# Altium PCB WSN_PCB_NODE.PcbDoc
Units mil, origin at the board's own origin, x right, y up, seen from the top; angles counter-clockwise.
Board outline 2580 x 2850 mil, 2 copper layers (Top Layer, Bottom Layer); 79 components, 80 nets, 350 pads, 109 vias.
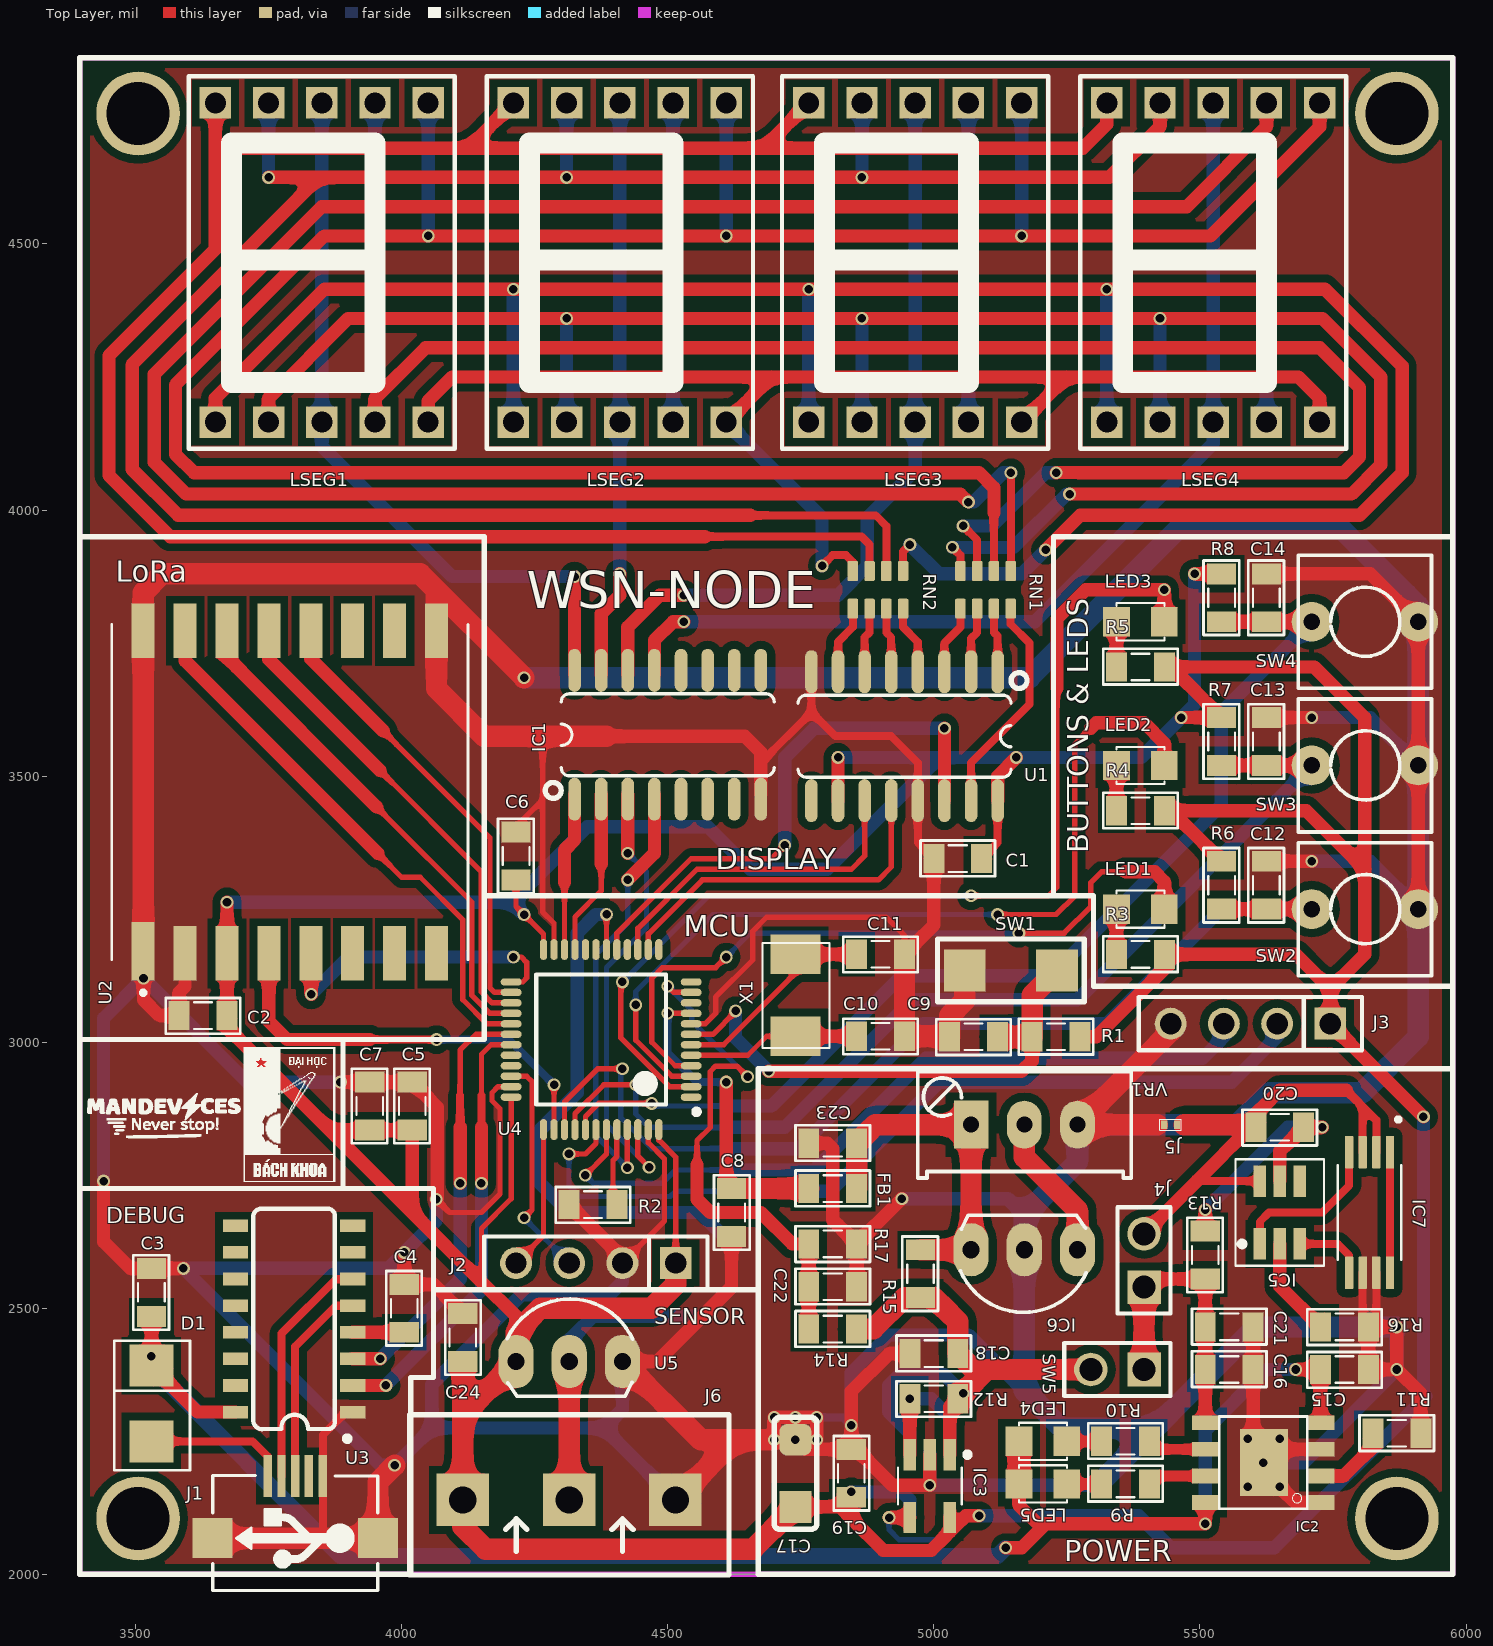
[diagram p0: Top Layer view]
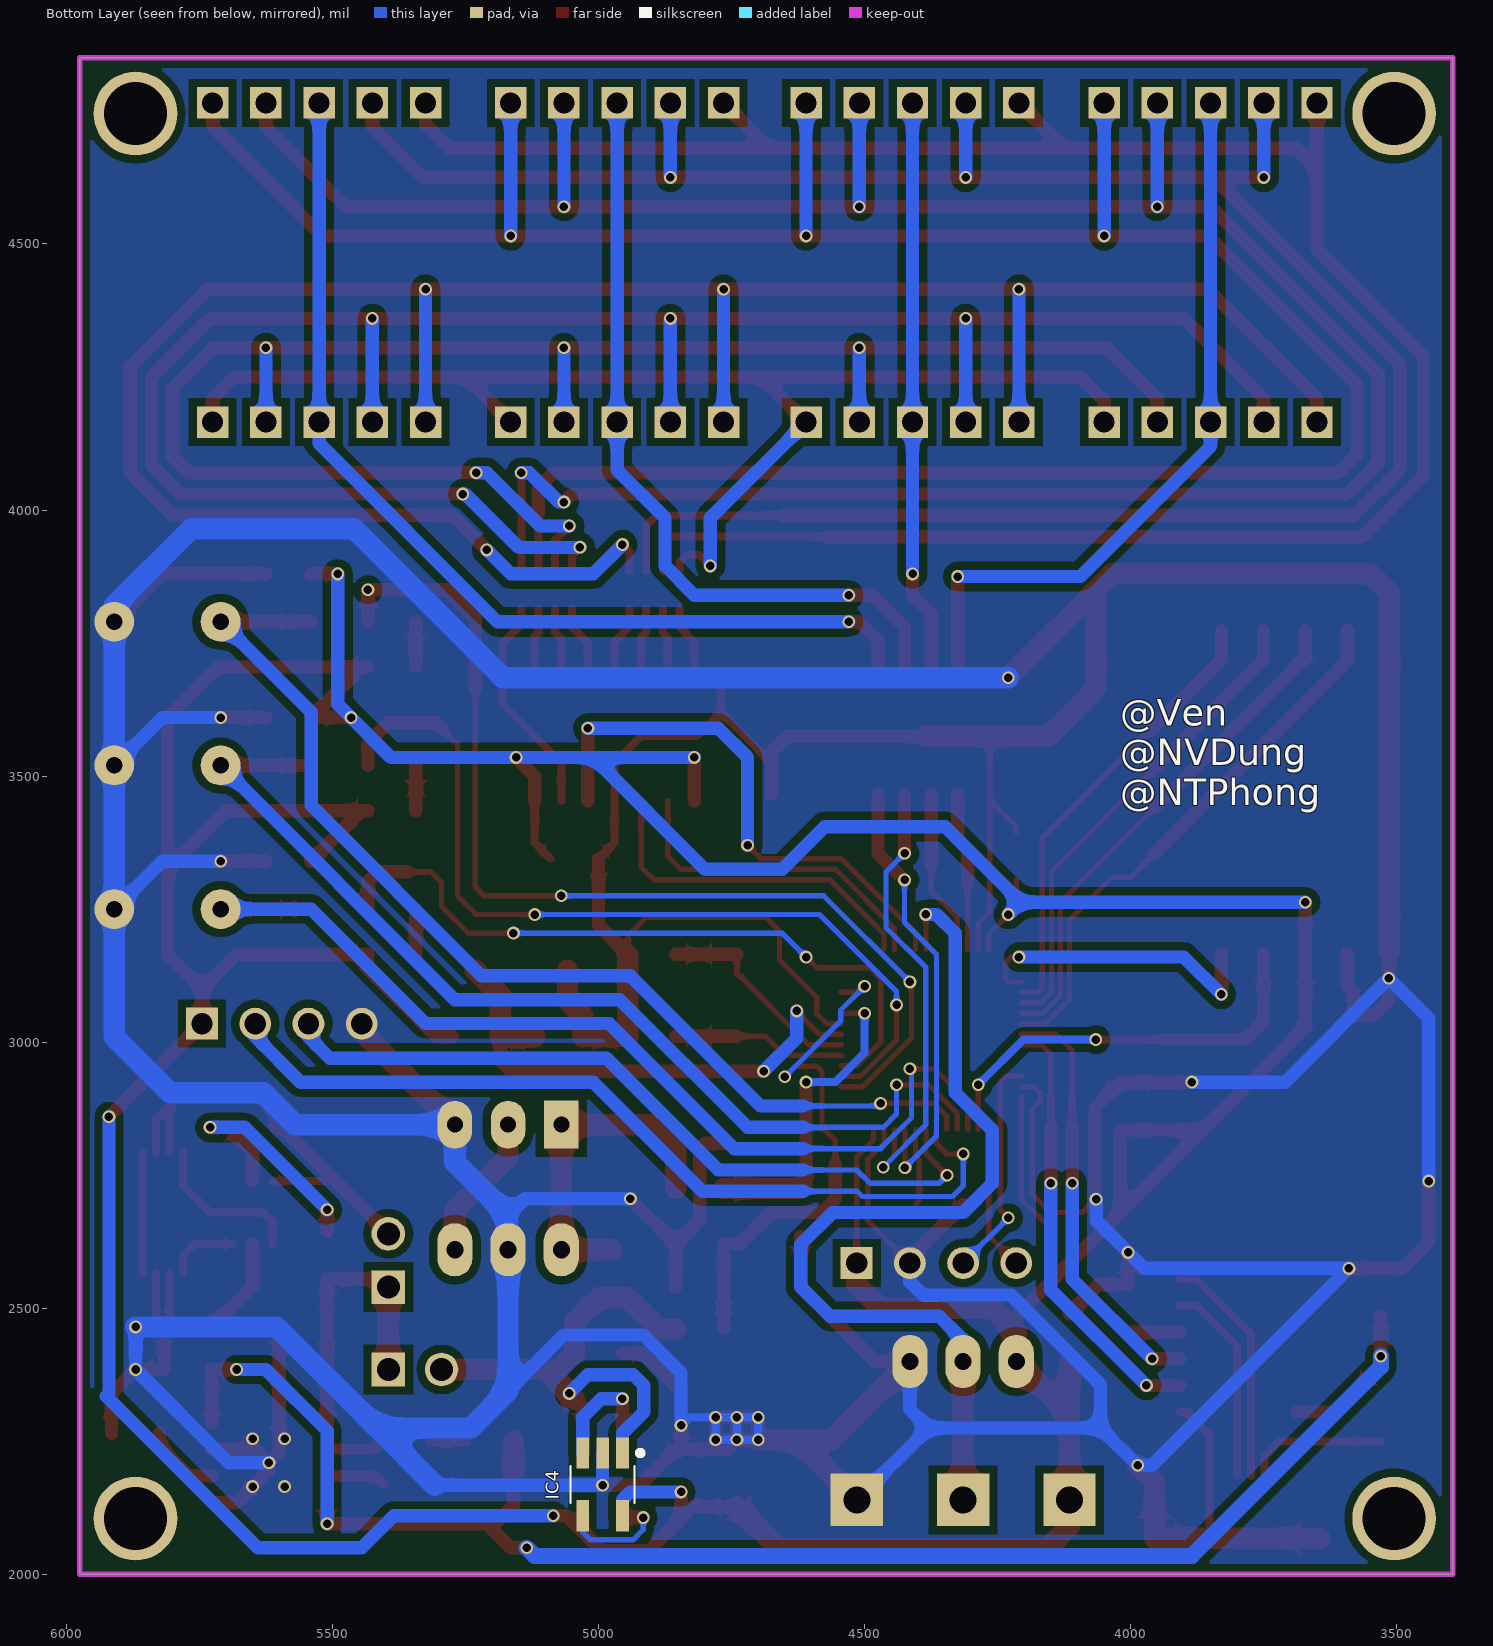
[diagram p1: Bottom Layer view, seen from below]
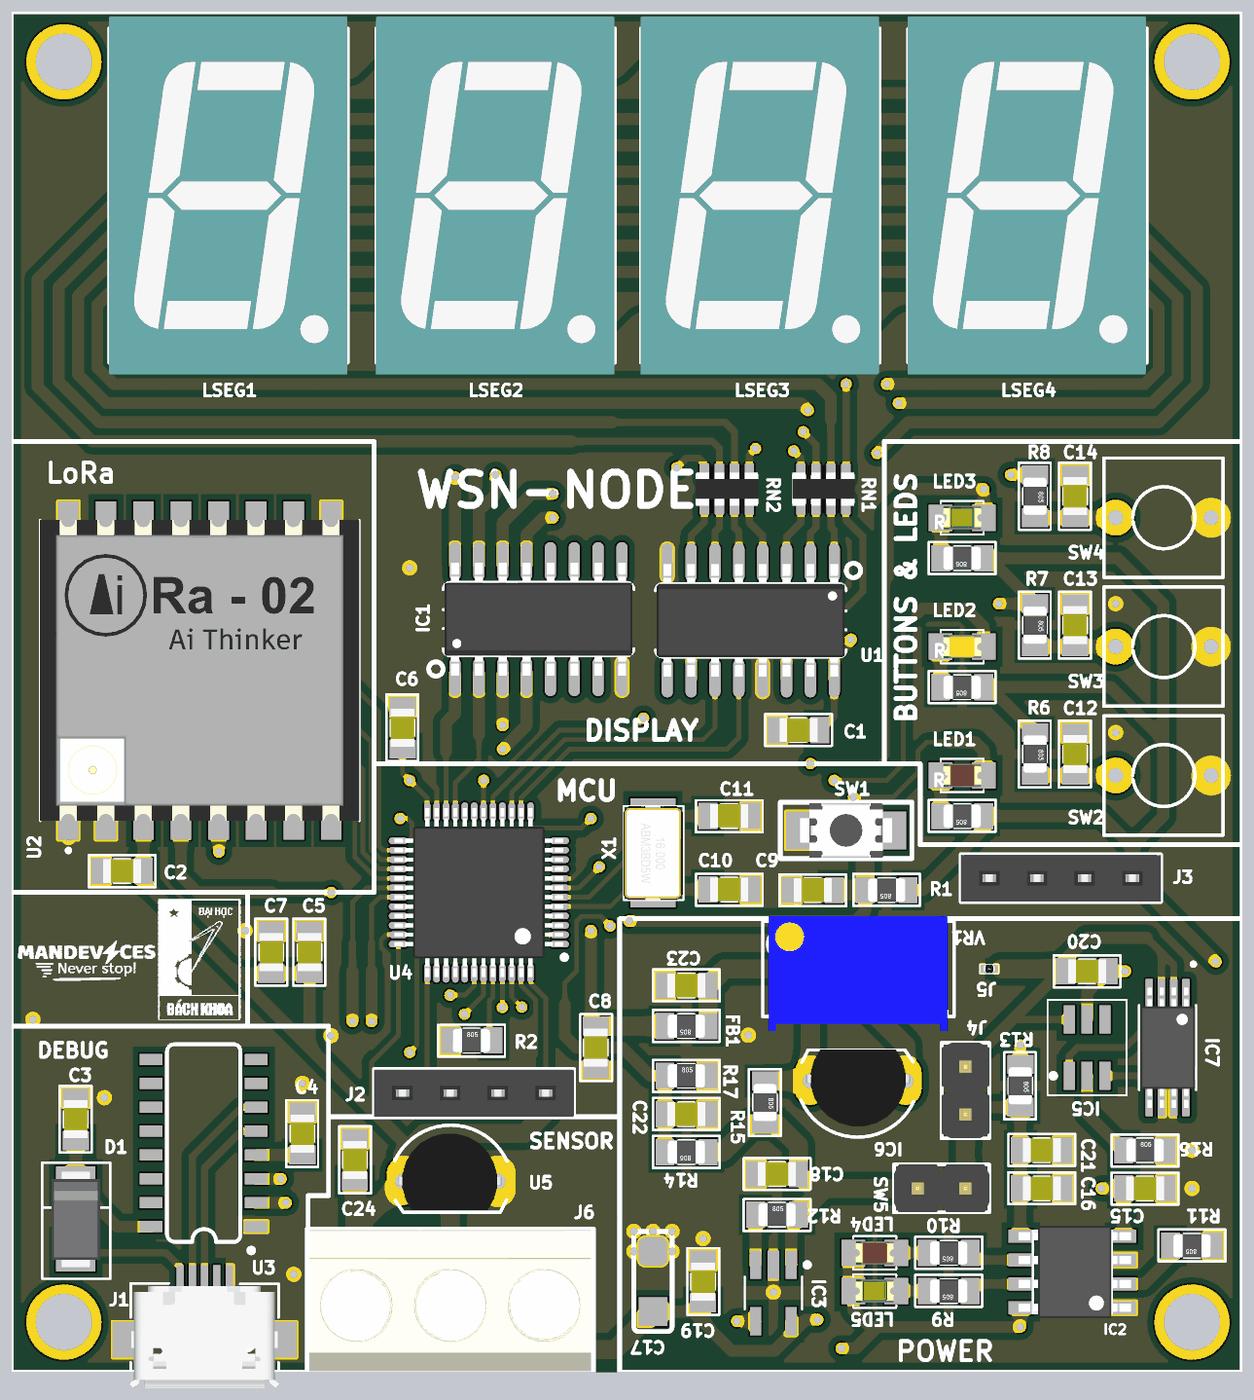
[diagram p2: 3D render of the assembled board from above, using the file's embedded part models]

## Layer stack, top to bottom
Top Solder: solder mask 0.4, Solder Resist, Dk 3.5
Top Layer: signal copper 1.4
Dielectric 1: dielectric 12.6, FR-4, Dk 4.8
Bottom Layer: signal copper 1.4
Bottom Solder: solder mask 0.4, Solder Resist, Dk 3.5

## Board outline
3395,2000 3395,4850 5975,4850 5975,2000

## Design rules (kind name [scope] priority, off if disabled: settings)
Clearance [All] p1: gap=15 ignorepadtopadclearanceinfootprint=TRUE except(0: Arc-Text Arc-Hole Track-Text Track-Hole SMDPad-Text SMDPad-Hole THPad-Text THPad-Hole Via-Text Via-Hole Fill-Text Fill-Hole Poly-Text Poly-Hole Region-Text Region-Hole Text-Text Text-Hole; 7: Arc-Arc Arc-Track Arc-SMDPad Track-Track Track-SMDPad SMDPad-SMDPad; 10: Arc-THPad Arc-Via Track-THPad Track-Via SMDPad-THPad SMDPad-Via THPad-THPad THPad-Via Via-Via)
DiffPairsRouting [All] p1: maxlimit=10 minlimit=10 mostfreqgap=10 toplayer_minwidth=15 toplayer_maxwidth=15 toplayer_prefwidth=15 bottomlayer_minwidth=15 bottomlayer_maxwidth=15 bottomlayer_prefwidth=15 maxuncoupledlength=500
PolygonConnect [All] p1: connectstyle=Direct reliefconductorwidth=10 reliefentries=4 polygonreliefangle="90 Angle" airgapwidth=10
RoutingVias [All] p1: holewidth=16 width=24 viastyle="Through Hole" minholewidth=16 minwidth=24 maxholewidth=20 maxwidth=28
SolderMaskExpansion [All] p1: expansion=4
Width [All] p1: maxlimit=40 minlimit=10 preferedwidth=25
29 further rules are at their usual default settings.

## Classes and differential pairs
component class U_SENSOR: C24 J6 U5
component class U_POWER: C15 C16 C17 C18 C19 C20 C21 C22 C23 FB1 IC2 IC3 IC4 IC5 IC6 IC7 J4 J5 LED4 LED5 R9 R10 R11 R12 R13 R14 R15 R16 R17 SW5 VR1
component class U_MCU: C5 C6 C7 C8 C9 C10 C11 C12 C13 C14 J2 J3 LED1 LED2 LED3 R1 R2 R3 R4 R5 R6 R7 R8 SW1 SW2 SW3 SW4 U4 X1
component class U_DISPLAY: C1 IC1 LSEG1 LSEG2 LSEG3 LSEG4 RN1 RN2 U1
component class U_COMM: C2 C3 C4 D1 J1 U2 U3
differential pair D: +D_P -D_N

## Components (designator, comment, footprint, x,y, rotation, side; value= is the part's Value field where it differs from the comment)
C1 "100nF" CAP_0805 5045,3345 r180 top value=33p
C2 "10uF" CAP_0805 3626.89,3050 r0 top value=33p
C3 "10uF" CAP_0805 3530,2530 r270 top value=33p
C4 "100nF" CAP_0805 4005,2500 r270 top value=33p
C5 "100nF" CAP_0805 4020,2880 r270 top value=33p
C6 "100nF" CAP_0805 4215,3350 r270 top value=33p
C7 "100nF" CAP_0805 3940,2880 r270 top value=33p
C8 "100nF" CAP_0805 4620,2680 r90 top value=33p
C9 "10uF" CAP_0805 5074.8,3010 r0 top value=33p
C10 "33pF" CAP_0805 4900,3011.13 r0 top value=33p
C11 "33pF" CAP_0805 4900,3165.13 r0 top value=33p
C12 "10uF" CAP_0805 5625,3295 r270 top value=33p
C13 "10uF" CAP_0805 5625,3565 r270 top value=33p
C14 "10uF" CAP_0805 5625,3835 r270 top value=33p
C15 "100nF" CAP_0805 5771.54,2385 r0 top value=33p
C16 "100nF" CAP_0805 5555,2385 r180 top value=33p
C17 "220uF" CAP_TANTALUM_3216 4740,2190 r90 top
C18 "470nF" CAP_0805 5000,2415 r180 top value=33p
C19 "100nF" CAP_0805 4845,2190 r90 top value=33p
C20 "100nF" CAP_0805 5650,2840 r0 top value=33p
C21 "100nF" CAP_0805 5555,2465 r180 top value=33p
C22 "100nF" CAP_0805 4810,2540.44 r180 top value=33p
C23 "100nF" CAP_0805 4810,2810 r180 top value=33p
C24 "100nF" CAP_0805 4115,2445 r90 top value=33p
D1 "Diode SMD" DIO-214AC(SMA) 3533,2299 r270 top value=1N5007
FB1 "Ferrit Bead" RES-SMD-0805 4810,2725 r180 top
IC1 "ULN2003A" SOIC16 4500,3577.64 r90 top
IC2 "TP4056" TP4056 5619.27,2210 r180 top
IC3 "RT9013" SOT23-5 4992.4,2165.94 r270 top
IC4 "RT9013" SOT23-5 4992.4,2169.06 r270 bottom
IC5 "DW01A" SOT23-6 5650,2680 r90 top
IC6 "TL431" qto-92 5170,2610 r180 top
IC7 "FS8205A" FS8205A 5816.54,2680 r270 top
J1 "USB-5" USB-M1 3800,2185 r180 top
J2 "JP4" JP4-C1T 4515,2585 r180 top
J3 "JP4" JP4-C1T 5745,3035 r180 top
J4 "JP2" JP2-D1T 5395,2540 r90 top
J5 "Jumper2" RES-SMD-0201 5445,2845 r180 top
J6 "KF3" KF3-5.08 4115,2140 r0 top
LED1 "LED" LED-0805-Red 5343.19,3250 r0 top value="LED 3 ly Single Colour"
LED2 "LED" LED-0805-Yellow 5343.19,3520 r0 top value="LED 3 ly Single Colour"
LED3 "LED" LED-0805-Green 5343.19,3790 r0 top value="LED 3 ly Single Colour"
LED4 "LED" LED-0805-Red 5160,2250 r0 top value="LED 3 ly Single Colour"
LED5 "LED" LED-0805-Green 5160,2170 r0 top value="LED 3 ly Single Colour"
LSEG1 "7SEG-K" LED7SEG 3849,4465 r0 top
LSEG2 "7SEG-K" LED7SEG 4409,4465 r0 top
LSEG3 "7SEG-K" LED7SEG 4964,4465 r0 top
LSEG4 "7SEG-K" LED7SEG 5524,4465 r0 top
R1 "10k" RES-SMD-0805 5229.8,3010 r180 top
R2 "100k" RES-SMD-0805 4359.53,2695 r0 top
R3 "1k" RES-SMD-0805 5388.19,3165 r180 top
R4 "1k" RES-SMD-0805 5388.19,3435 r180 top
R5 "1k" RES-SMD-0805 5388.19,3705 r180 top
R6 "10k" RES-SMD-0805 5540.73,3295 r270 top
R7 "10k" RES-SMD-0805 5540.73,3565 r270 top
R8 "10k" RES-SMD-0805 5540.73,3835 r270 top
R9 "1k" RES-SMD-0805 5360,2170 r180 top
R10 "1k" RES-SMD-0805 5360,2250 r180 top
R11 "1k2" RES-SMD-0805 5870,2265 r180 top
R12 "10k" RES-SMD-0805 5000,2330 r0 top
R13 "10R" RES-SMD-0805 5510,2600 r270 top
R14 "30k" RES-SMD-0805 4810,2460.94 r180 top
R15 "10k" RES-SMD-0805 4975,2565 r270 top
R16 "1k" RES-SMD-0805 5771.54,2465 r0 top
R17 "100k" RES-SMD-0805 4810,2620.94 r0 top
RN1 "RP330" RN4-0805 5097.24,3850 r270 top
RN2 "RP330" RN4-0805 4895,3850 r270 top
SW1 "SW" "SW 3x2x4" 5144.8,3135 r0 top value="SW chip 2 pin"
SW2 "SW" SW2 5910,3250 r180 top value="SW chip 2 pin"
SW3 "SW" SW2 5910,3520 r180 top value="SW chip 2 pin"
SW4 "SW" SW2 5910,3790 r180 top value="SW chip 2 pin"
SW5 "SW" JP2-D1T 5395,2385 r180 top value="SW chip 2 pin"
U1 "74HC595" SOIC16 4945,3575 r270 top
U2 "Ra-02 LoRa" Ra-02 3790,3470 r90 top
U3 "CH340C" SOP-16 3797.87,2480 r90 top
U4 "STM32" "LQFP 48" 4375,3005 r180 top
U5 "DS18B20" QTO-92A 4315,2400 r0 top
VR1 "10K" VR1 5070,2845 r0 top value="VR 10K"
X1 "8Mhz" "XTAL 5032 SMD" 4740,3087.13 r270 top value=4Mhz

## Footprints (in the part's own frame and the unit in brackets; to place one, negate y for a bottom-side part, rotate by r counter-clockwise, add the part's x,y. Pads: shape width x height; smd on the part's side, far side on the other; paste and mask are expansions set on the pad)
CAP_0805 [mil]
  rect 39.37x55 smd: 1(-45,0) 2(45,0)
  silkscreen extent -70,-34 70,33, body extent -40,-25 40,25, height 24
CAP_TANTALUM_3216 [mil]
  rect 60x60 smd: 1(-62.99,0)
  rrect50% 60x60 smd: 2(62.99,0)
  silkscreen extent -105,-40 105,40, body extent -67,-35 67,35, height 67
DIO-214AC(SMA) [mm] "DO-214AC Diode Smallest Size"
  rect 2x2.1 smd: 1(1.245,-0.076) 2(-2.367,-0.076)
  silkscreen extent -3.56,-1.86 2.62,1.76, body extent -3.13,-1.38 2.07,1.22, height 2.4
FS8205A [mm]
  rrect25% 1.56x0.4 smd: 1(-2.88,1.031) 2(-2.88,0.381) 3(-2.88,-0.269) 4(-2.88,-0.919) 5(2.88,-0.919) 6(2.88,-0.269) 7(2.88,0.381) 8(2.88,1.031)
  silkscreen extent -4.54,-1.46 2.25,1.57, body extent -3.2,-1.4 3.2,1.53, height 1.2
JP2-D1T [mm] "2 pins, 1 row, straight, gold plating"
  rect 1.6x1.6 hole 1.1: 1(0,0)
  round 1.6 hole 1.1: 2(2.54,0)
  silkscreen extent -1.27,-1.27 3.81,1.27, body extent -1.27,-1.27 3.81,1.27, height 8.54
JP4-C1T [mm] "4 row, straight, gold plating"
  rect 1.52x1.52 hole 1.02: 1(0,0)
  round 1.52 hole 1.02: 2(2.54,0) 3(5.08,0) 4(7.62,0)
  silkscreen extent -1.52,-1.27 9.14,1.27, body extent -1.52,-1.25 9.14,1.25, height 8.51
KF3-5.08 [mm]
  rect 2.5x2.5 hole 1.3: 1(0,0) 2(5.08,0) 3(10.147,0)
  silkscreen extent -2.54,-3.58 12.7,4.06, body extent -2.42,-3.51 12.58,3.99, height 10
LED7SEG [mm] "LED7SEG"
  round 1.524 on Top Overlay: 0(4.724,-5.334)
  rect 1.5x1.5 hole 1: 1(-5.055,-7.62) 2(-2.515,-7.62) 3(0.025,-7.62) 4(2.565,-7.62) 5(5.105,-7.62) 6(5.105,7.62) 7(2.565,7.62) 8(0.025,7.62) 9(-2.515,7.62) 10(-5.055,7.62)
  silkscreen extent -6.32,-8.89 6.38,8.89, body extent -6.35,-9.52 6.35,9.53, height 8.03
LED-0805-Green [mil]
  rect 50x55 smd: 1(0,0) 2(90,0)
  silkscreen extent 0,-35 90,35, body extent 5,-25 85,25, height 43
LED-0805-Red [mil]
  rect 50x55 smd: 1(0,0) 2(90,0)
  silkscreen extent 0,-35 90,35, body extent 5,-25 85,25, height 43
LED-0805-Yellow [mil]
  rect 50x55 smd: 1(0,0) 2(90,0)
  silkscreen extent 0,-35 90,35, body extent 5,-25 85,25, height 43
"LQFP 48" [mm] "LQFP, 48-Leads, Body 7,00x7,00mm, Pitch 0,50mm, IPC Medium Density"
  oval 1x0.35 smd: 1(-4.296,2.75) 2(-4.296,2.25) 3(-4.296,1.75) 4(-4.296,1.25) 5(-4.296,0.75) 6(-4.296,0.25) 7(-4.296,-0.25) 8(-4.296,-0.75) 9(-4.296,-1.25) 10(-4.296,-1.75) 11(-4.296,-2.25) 12(-4.296,-2.75) 25(4.296,-2.75) 26(4.296,-2.25) 27(4.296,-1.75) 28(4.296,-1.25) 29(4.296,-0.75) 30(4.296,-0.25) 31(4.296,0.25) 32(4.296,0.75) 33(4.296,1.25) 34(4.296,1.75) 35(4.296,2.25) 36(4.296,2.75)
  oval 0.35x1 smd: 13(-2.75,-4.296) 14(-2.25,-4.296) 15(-1.75,-4.296) 16(-1.25,-4.296) 17(-0.75,-4.296) 18(-0.25,-4.296) 19(0.25,-4.296) 20(0.75,-4.296) 21(1.25,-4.296) 22(1.75,-4.296) 23(2.25,-4.296) 24(2.75,-4.296) 37(2.75,4.296) 38(2.25,4.296) 39(1.75,4.296) 40(1.25,4.296) 41(0.75,4.296) 42(0.25,4.296) 43(-0.25,4.296) 44(-0.75,4.296) 45(-1.25,4.296) 46(-1.75,4.296) 47(-2.25,4.296) 48(-2.75,4.296)
  silkscreen extent -4.68,-3.1 3.1,3.57, body extent -4.5,-4.5 4.5,4.5, height 1.6
qto-92 [mil] "TO-92"
  oval 66x100 hole 32: 1(-100,0) 2(0,0) 3(100,0)
  silkscreen extent -117,-65 120,118, body extent -109,-66 109,95, height 245
QTO-92A [mil] "TO-92"
  oval 66x100 hole 32: 1(100,0) 2(0,0) 3(-100,0)
  silkscreen extent -117,-65 119,118, body extent -110,-61 108,100, height 245
Ra-02 [mm]
  rect 2.8x1.1 smd: 1(-7.6,7)
  rect 2.6x1.1 smd: 2(-7.7,5) 3(-7.7,3) 4(-7.7,1) 5(-7.7,-1) 6(-7.7,-3) 7(-7.7,-5) 8(-7.7,-7) 9(7.7,-7) 10(7.7,-5) 11(7.7,-3) 12(7.7,-1) 13(7.7,1) 14(7.7,3) 15(7.7,5) 16(7.7,7)
  silkscreen extent -9.68,-8.5 8,8.5, body extent -8,-8.49 8,8.51, height 3.03
RES-SMD-0201 [mm]
  rect 0.3x0.4 smd: 1(-0.3,0) 2(0.3,0)
  silkscreen extent -0.51,-0.25 0.51,0.25, body extent -0.3,-0.15 0.3,0.15, height 0.22
RES-SMD-0805 [mil]
  rect 39.37x55 smd: 1(-45,0) 2(45,0)
  silkscreen extent -70,-34 70,33, body extent -39,-25 39,25, height 31
RN4-0805 [mm]
  round 0.254 on Mech15: 0(0,0)
  rrect25% 0.95x0.5 smd: 1(-0.9,1.2) 2(-0.9,0.4) 3(-0.9,-0.4) 4(-0.9,-1.2) 5(0.9,-1.2) 6(0.9,-0.4) 7(0.9,0.4) 8(0.9,1.2)
  Top Layer pour cut-out: -0.4,1.7 0.4,1.7 0.4,-1.7 -0.4,-1.7
  body extent -0.87,-1.68 0.88,1.67, height 0.7
SOIC16 [mm]
  oval 2.05x0.6 smd: 1(-3.075,4.445) 2(-3.075,3.175) 3(-3.075,1.905) 4(-3.075,0.635) 5(-3.075,-0.635) 6(-3.075,-1.905) 7(-3.075,-3.175) 8(-3.075,-4.445) 9(3.075,-4.445) 10(3.075,-3.175) 11(3.075,-1.905) 12(3.075,-0.635) 13(3.075,0.635) 14(3.075,1.905) 15(3.075,3.175) 16(3.075,4.445)
  silkscreen extent -3.04,-5.08 1.96,5.84, body extent -3,-5 3,5, height 1.75
SOP-16 [mm]
  rect 0.6x1.2 smd: 1(-4.445,-2.8) 2(-3.175,-2.8) 3(-1.905,-2.8) 4(-0.635,-2.8) 5(0.635,-2.8) 6(1.905,-2.8) 7(3.175,-2.8) 8(4.445,-2.8) 9(4.445,2.8) 10(3.175,2.8) 11(1.905,2.8) 12(0.635,2.8) 13(-0.635,2.8) 14(-1.905,2.8) 15(-3.175,2.8) 16(-4.445,2.8)
  silkscreen extent -5.84,-2.67 5.26,1.95, body extent -4.95,-3.47 4.95,3.47, height 1.75
SOT23-5 [mm] "SOT23, 5-Leads, Body 3.0x3.0mm (max), Pitch 0.95mm, IPC Medium Density"
  rect 1.5x0.6 smd: 1(-1.5,0.95) 2(-1.5,0) 3(-1.5,-0.95) 4(1.5,-0.95) 5(1.5,0.95)
  silkscreen extent -1.62,-1.52 0.87,1.93, body extent -1.75,-1.52 1.75,1.53, height 1.45
SOT23-6 [mm] "SOT23, 5-Leads, Body 3.0x3.0mm (max), Pitch 0.95mm, IPC Medium Density"
  rect 1.5x0.6 smd: 1(-1.5,0.95) 2(-1.5,0) 3(-1.5,-0.95) 4(1.5,-0.95) 5(1.5,0) 6(1.5,0.95)
  silkscreen extent -2.54,-2.11 2.54,2.11, body extent -1.75,-1.52 1.75,1.53, height 1.45
SW2 [mil] "SW button 2pin, 250x 250 mil"
  round 75 hole 31: 1(0,0) 2(200,0)
  silkscreen extent -25,-125 225,125
"SW 3x2x4" [mm]
  rect 2x2 smd: 1(-2.2,0) 2(2.2,0)
  silkscreen extent -3.5,-1.5 3.5,1.5, body extent -2.45,-1.45 2.45,1.45, height 2
TP4056 [mm]
  rect 1.3x0.7 smd: 1(-2.75,1.905) 2(-2.75,0.635) 3(-2.75,-0.635) 4(-2.75,-1.905) 5(2.75,-1.905) 6(2.75,-0.635) 7(2.75,0.635) 8(2.75,1.905)
  rect 2.3x3.2 smd: 3(-0.025,0)
  silkscreen extent -2.1,-2.2 2.1,2.2, body extent -3.13,-2.45 2.87,2.45, height 1.75
USB-M1 [mm]
  rect 0.4x2 smd: 1(1.3,0) 2(0.65,0) 3(0,0) 4(-0.65,0) 5(-1.321,0)
  rect 1.9x1.9 smd: 5(-3.95,2.968) 5(3.95,2.968)
  silkscreen extent -3.94,-0.03 3.94,5.46, body extent -3.98,0.11 4,5.54, height 2.71
VR1 [mil] "Variable Resistor"
  rect 65x90 hole 30: 1(0,0)
  oval 65x90 hole 30: 2(100,0) 3(200,0)
  silkscreen extent -100,-100 301,100, body extent -88,-130 288,110, height 455
"XTAL 5032 SMD" [mm] "SMD 5032 XTAL Footprint"
  rect 1.9x2.4 smd: 1(-1.981,0) 2(1.93,0)
  silkscreen extent -2.51,-1.57 2.49,1.63, body extent -2.5,-1.6 2.5,1.6, height 1.31

## Part data
C1 C2 C3 C4 C5 C6 C7 C8 C9 C10 C11 C12 C13 C14 C15 C16 C18 C19 C20 C21 C22 C23 C24: library part CapSMD, "Capacitor", LatestRevisionDate=17-Jul-2002, LatestRevisionNote="Re-released for DXP Platform.", PackageReference=RAD-0.3, Published=8-Jun-2000, Publisher="Altium Limited"
C17: library part "Cap Pol", "Polarized Capacitor (Axial)", LatestRevisionDate=17-Jul-2002, LatestRevisionNote="Re-released for DXP Platform.", PackageReference=POLAR0.8, Published=8-Jun-2000, Publisher="Altium Limited"
D1: "Default Diode", Code - JEDEC=DO-214-AB, Published=8-Jun-2000, Publisher="Altium Limited", Revision="July-2002: Re-released for DXP Platform."
FB1: "Generic Ferrit Bead"
IC1: "High-Voltage, High-Current Darlington Array", LatestRevisionNote="Stylized 3D Model Added.", Publisher="Altium Limited"
IC2: "Complete single cell Li-Ion battery with a constant current / constant voltage linear charger"
IC3 IC4: "RT9013-33GB IC REG LINEAR 3.3V 500mA SOT23-5"
IC5: "One Cell Lithium-ion/Polymer Battery Protection IC"
IC6: "Programmable Shunt Regulator"
J1: Manufacturer=FCI, Manufacturer Part Number=10118193-0001LF, Supplier Part Number 1=609-4616-1-ND, .Checked PCB=RF, .Checked SCH=MM, .Creator=MM, Category="Connectors, Interconnects", ComponentLink1Description=http://portal.fciconnect.com/Comergent//fci/drawing/10118193.pdf, ComponentLink1URL=http://portal.fciconnect.com/Comergent//fci/drawing/10118193.pdf, Connector Type="USB - micro B", Features="Shielded, Solder Retention", Gender=Receptacle, Ingress Protection=-, Mounting Type="Surface Mount, Right Angle, Horizontal", Number of Contacts=5, Packaging="Cut Tape (CT)", Pricing 1="1=0.46, 10=0.433, 25=0.3712, 50=0.3156, 100=0.3032, 250=0.27224, 500=0.25988 (USD)", RoHS="RoHS Compliant", Specifications="USB 2.0", Stock 1=28642, Supplier 1=Digi-Key
J2 J3: "WR-PHD 2.54 mm Angled Socket Header", Manufacturer="Würth Elektronik eiSos GmbH", partNo=613004143121, ComponentLink1 Description=Manufacturer, ComponentLink1URL=http://www.we-online.com, ComponentLink2 Description=Datasheet, ComponentLink2URL=http://katalog.we-online.de/em/datasheet/6130xx143121.pdf, Created by="Karrer Zheng", Created Date="29 March 2013", NoPins=04
J4: "WR-PHD 2.54 mm Angled Socket Header", Manufacturer="Würth Elektronik eiSos GmbH", partNo=613002143121, ComponentLink1 Description=Manufacturer, ComponentLink1URL=http://www.we-online.com, ComponentLink2 Description=Datasheet, ComponentLink2URL=http://katalog.we-online.de/em/datasheet/6130xx143121.pdf, Created by="Karrer Zheng", Created Date="29 March 2013", NoPins=02
J5: "Jumper, 2-Pin"
J6: Manufacturer="Würth Elektronik eiSos GmbH", partNo=691103110003, ComponentLink1 Description=Manufacturer, ComponentLink1URL=http://www.we-online.com, ComponentLink2 Description=Datasheet, ComponentLink2URL=http://katalog.we-online.de/em/datasheet/6911031100xx.pdf, Created by="Karrer Zheng", Created Date="29 October 2013", NoPins=3
LED1 LED2 LED3 LED4 LED5: "LED Single colour Green and Red"
LSEG1 LSEG2 LSEG3 LSEG4: library part LED7SEG-K, "14.2 mm General Purpose Blue 7-Segment Display: CC, RH DP, Gray Surface", Colour=Blue, PackageDocument=24-Sep-2002, ComponentLink1Description="Manufacturer Link", ComponentLink1URL=http://www.agilent.com/, DatasheetDocument=24-Sep-2002, LatestRevisionDate=17-Dec-2003, LatestRevisionNote="Schematic revised, PCB Footprint replaced.", MinimumIntensity="2020 ucd", Note="IF = 10 mA", PackageReference=H, Published=8-Jun-2000, Publisher="Altium Limited"
R1 R2 R3 R4 R5 R6 R7 R8 R13 R16: library part "Resistor - SMD", "Resistor SMD", Manufacturer="Generic Components", Class=Passive, Published=08/06/2000, Publisher="Altium Hobart Technology Centre"
R9 R10 R11 R12 R14 R15 R17: library part "Resistor - SMD", "Resistor", Manufacturer="Generic Components", Class=Passive, Published=08/06/2000, Publisher="Altium Hobart Technology Centre"
RN1 RN2: library part RN4-Dual
SW1 SW2 SW3 SW4 SW5: library part SW2, "Switch button 2 pin"
U1: "8-bit Serial-Input/Serial or Parallel Output Shift Register with Latched 3-state Outputs"
U2: "LoRa Module Ra-02"
U3: "USB to serial chip CH340", Package=Package, Availability=Unavailable, Check_prices=https://www.snapeda.com/parts/CH340C/WCH/view-part/5428851/?ref=eda, MF=WCH, MP=CH340C, Price=None, SnapEDA_Link=https://www.snapeda.com/parts/CH340C/WCH/view-part/5428851/?ref=snap
U4: library part STM32F103C8T6, "STM32 ARM-based 32-bit MCU with 64 Kbytes Flash, 64-pin LQFP, Industrial Temperature"
U5: "High Precision  1-Wire® Digital Thermometer"
VR1: library part VR, "Var Resistor"
X1: library part XT2, "Crystal For all Crystal 2pin."

## Free pads (board coordinates)
  round 157.48 hole 118.11: 0(3505,2105) 0(3505,4745) 0(5870,2105) 0(5870,4745)

## Via types
v1: diameter 24, hole 16, Top Layer to Bottom Layer, 109 vias

## Nets (pads, with @x,y where several pads share a name; then routed paths per layer and width w, separated by ;. In a path a pad name is that pad's centre, name@x,y a point inside that pad or via, vN(x,y) a via of type N, cw(c..) or ccw(c..) an arc to the next point about the centre after c; other vN are vias at no path point)
3V3: C1.1 C2.2 C5.2 C6.2 C7.2 C17.1 C19.1 C24.1 IC3.5 IC4.5 J2.1 J3.1 J6.1 R1.1 R3.1 R4.1 R5.1 R6.1 R7.1 R8.1 U1.10 U1.16 U2.3 U4.24 U4.36 U4.48 U5.3 | length 11301.8
  Top Layer w10: 4150,2550 4150,2650 4205.87,2705.87 U4.36 ; C6.2 4215,3254.84 v1(4230,3239.84) 4266.73,3203.11 U4.24 ; U4.48 4483.27,2815.94 4515,2784.21 J2.1
  Top Layer w15: C1.1 5120,3375 U1.16
  Top Layer w25: v1(3671.89,3263) U2.3 C2.2 3671.89,3028.11 3865,2835 ; 4215,2455 4215,2485 4150,2550 4020,2680 ; C17.1 4822.99,2127.01 4845,2105 ; U1.10 v1(4820,3535) ; C19.1 4845,2105 ; IC3.5 IC3.5@5029.8,2079.8 ; v1(5085,2110) 5060,2110 IC3.5@5029.8,2079.8 ; U1.16 5120,3500 v1(5155,3535) ; R1.1 5305,3010 5433.19,3138.19 R3.1 5680,3165 5745,3100 ; R4.1 R4.1@5445.73,3435 ; R5.1 R5.1@5445.73,3705 ; v1(5465,3610) R7.1 R5.1@5445.73,3705 ; v1(5490,3880) R8.1 ; R6.1 R4.1@5445.73,3435 ; v1(5920,2860) J3.1 5745,3100 ; 3865,2835 4020,2680 ; 3865,2835 C7.2 C5.2 4020,2680 ; 4845,2105 4905,2045 4995,2045 IC3.5@5029.8,2079.8 ; R4.1@5445.73,3435 5700,3435 5810,3325 ; R5.1@5445.73,3705 5715,3705 5810,3610 5810,3325 ; 5745,3100 5810,3165 5810,3325
  Top Layer w40: C24.1 4115,2300 ; J2.1 4515,2545 4470,2500 4260,2500 4215,2455 U5.3 4115,2300 ; C17.1 4660.48,2047.49 4157.66,2047.49 4115,2090.16 J6.1 4115,2300
  Bottom Layer w25: v1(3671.89,3263) 4206.84,3263 ; v1(4230,3239.84) 4206.84,3263 ; v1(4820,3535) 5010,3535 ; v1(4845,2155) 4940,2155 4955,2140 IC4.5 ; 5030,3535 5010,3535 ; v1(5085,2110) 5385,2110 5445,2050 5640,2050 5925,2335 5920,2340 v1(5920,2860) ; v1(5490,3880) 5490,3635 v1(5465,3610) 5390,3535 v1(5155,3535) 5010,3535 ; 4206.84,3263 4348.84,3405 4575,3405 4655,3325 4800,3325 5010,3535
5V: C3.2 C15.1 D1.2 IC2.4 IC2.8 LED4.1 LED5.1 U3.16 | length 3222.1
  Top Layer w25: C3.2 v1(3530,2410) D1.2 3617.2,2305 U3.16 ; v1(5135,2050) 5165,2050 5210,2095 ; LED5.1 5160,2130 5195,2095 5210,2095 ; IC2.8@5510,2135 v1(5510,2095) 5210,2095 ; v1(5680,2385) C15.1 IC2.4@5726.54,2285
  Top Layer w40: LED5.1 LED4.1
  Bottom Layer w25: v1(5510,2095) 5510,2270 5625,2385 v1(5680,2385)
  Bottom Layer w30: v1(3530,2410) 3530,2390 3885,2035 5120,2035 v1(5135,2050)
A: LSEG1.7 LSEG2.7 LSEG3.7 LSEG4.7 RN1.1 | length 4926.2
  Top Layer w15: RN1.1 5145,3885.94 v1(5145,4070)
  Top Layer w25: v1(5065,4015) 5050,4030 3595,4030 3535,4090 3535,4255 3850,4570 v1(3950,4570) v1(4510,4570) v1(5065,4570) 5475,4570 5625,4720 LSEG4.7
  Bottom Layer w25: v1(3950,4570) LSEG1.7 ; v1(4510,4570) LSEG2.7 ; v1(5065,4015) 5075,4015 5130,4070 v1(5145,4070) ; v1(5065,4570) LSEG3.7
B: LSEG1.6 LSEG2.6 LSEG3.6 LSEG4.6 RN1.2 | length 4996.6
  Top Layer w15: RN1.2 5112.99,3995
  Top Layer w25: 5112.99,3995 5112.99,4042.01 5085,4070 3610,4070 3575,4105 3575,4235 3855,4515 v1(4610,4515) v1(5165,4515) 5520,4515 5725,4720 LSEG4.6
  Bottom Layer w25: v1(4050,4515) LSEG1.6 ; v1(4610,4515) LSEG2.6 ; v1(5165,4515) LSEG3.6
C: LSEG1.4 LSEG2.4 LSEG3.4 LSEG4.4 RN1.3 | length 3410.2
  Top Layer w15: v1(5055,3970) 5081.5,3943.5 RN1.3
  Top Layer w25: LSEG1.4 3950,4210 4045,4305 v1(4510,4305) v1(5065,4305) v1(5625,4305) 5725,4305 5800,4230 5800,4100 5770,4070 5272.28,4070 5271.78,4070.5 5230.5,4070.5 v1(5230,4070)
  Bottom Layer w25: LSEG2.4 v1(4510,4305) ; v1(5055,3970) 5110,3970 5210,4070 v1(5230,4070) ; LSEG3.4 v1(5065,4305) ; LSEG4.4 v1(5625,4305)
D: LSEG1.2 LSEG2.2 LSEG3.2 LSEG4.2 RN1.4 | length 3913.1
  Top Layer w15: v1(5035,3930) 5050,3915 RN1.4
  Top Layer w25: LSEG1.2 3750,4210 3900,4360 v1(4310,4360) v1(4865,4360) v1(5425,4360) 5730,4360 5840,4250 5840,4085 5785,4030 v1(5255,4030)
  Bottom Layer w25: LSEG2.2 v1(4310,4360) ; LSEG3.2 v1(4865,4360) ; v1(5035,3930) 5035.5,3929.5 5149.5,3929.5 5250,4030 v1(5255,4030) ; LSEG4.2 v1(5425,4360)
D_N: J1.2 U3.6 | length 443.6
  Top Layer w15: J1.2 3774.41,2452.42 3876.99,2555 U3.6
D_P: J1.3 U3.5 | length 383
  Top Layer w15: J1.3 3800,2428.01 3876.99,2505 U3.5
DIG0: IC1.13 LSEG4.3 LSEG4.8 | length 1908.3
  Top Layer w25: IC1.13@4475,3690 4475,3755 4510,3790 v1(4530,3790)
  Bottom Layer w25: v1(4530,3790) 5190,3790 5525,4125 LSEG4.3 LSEG4.8
DIG1: IC1.14 LSEG3.3 LSEG3.8 | length 1494.9
  Top Layer w25: IC1.14@4425,3690 4425,3780 4485,3840 v1(4530,3840)
  Bottom Layer w25: v1(4530,3840) 4820,3840 4875,3895 4875,3985 4965,4075 LSEG3.3 LSEG3.8
DIG2: IC1.15 LSEG2.3 LSEG2.8 | length 1089.5
  Top Layer w25: IC1.15@4375,3690 4375,3805 4410,3840 v1(4410,3880)
  Bottom Layer w25: v1(4410,3880) LSEG2.3 LSEG2.8
DIG3: IC1.16 LSEG1.3 LSEG1.8 | length 1406.5
  Top Layer w25: IC1.16@4325,3690 v1(4325,3875)
  Bottom Layer w25: LSEG1.8 LSEG1.3 3850,4120 4095,3875 v1(4325,3875)
DP: LSEG1.5 LSEG2.5 LSEG3.5 LSEG4.5 RN2.4 | length 2468.3
  Top Layer w15: v1(4790,3895) 4810,3915 4835,3915 4847.76,3902.24 RN2.4
  Top Layer w25: LSEG1.5 4050,4205 4095,4250 4695,4250 ; LSEG2.5 4695,4250 ; LSEG3.5 5250,4250 ; LSEG4.5 5725,4210 5685,4250 5250,4250 ; 4695,4250 5250,4250
  Bottom Layer w25: LSEG2.5 4790,3985 v1(4790,3895)
E: LSEG1.1 LSEG2.1 LSEG3.1 LSEG4.1 RN2.1 | length 4451.3
  Top Layer w15: RN2.1 4942.24,3922.24 v1(4955,3935)
  Top Layer w25: LSEG1.1 3650,4210 3855,4415 v1(4210,4415) v1(4765,4415) v1(5325,4415) 5735,4415 5880,4270 5880,4070 5800,3990 5275,3990 v1(5210,3925)
  Bottom Layer w25: LSEG2.1 v1(4210,4415) ; LSEG3.1 v1(4765,4415) ; v1(4955,3935) 5010,3880 5165,3880 v1(5210,3925) ; LSEG4.1 v1(5325,4415)
F: LSEG1.9 LSEG2.9 LSEG3.9 LSEG4.9 RN2.2 | length 4419.1
  Top Layer w15: 4655,3990 4890.75,3990 4910.75,3970 RN2.2
  Top Layer w25: v1(3750,4625) 3845,4625 ; 4655,3990 3580,3990 3493.89,4076.11 3493.89,4272.03 3495,4273.14 3495,4275 3845,4625 ; LSEG4.9 5425,4720 5330,4625 v1(4865,4625) v1(4310,4625) 3845,4625
  Bottom Layer w25: v1(3750,4625) LSEG1.9 ; v1(4310,4625) LSEG2.9 ; v1(4865,4625) LSEG3.9
G: LSEG1.10 LSEG2.10 LSEG3.10 LSEG4.10 RN2.3 | length 4306.1
  Top Layer w15: 4570,3950 4864.25,3950 4879.25,3935 RN2.3
  Top Layer w25: LSEG1.10 3650,4640 ; LSEG2.10 4125,4680 ; 4570,3950 3565,3950 3450,4065 3450,4290 3650,4490 3650,4640 ; LSEG3.10 4680,4680 ; LSEG4.10 5325,4725 5280,4680 4680,4680 ; 3650,4640 3690,4680 4125,4680 ; 4125,4680 4680,4680
GND: C1.2 C2.1 C3.1 C4.1 C5.1 C6.1 C7.1 C8.1 C9.1 C10.2 C11.2 C12.1 C13.1 C14.1 C15.2 C16.1 C17.2 C18.2 C19.2 C21.1 C22.1 C23.2 C24.2 IC1.8 IC2.1 IC2.3 IC3.2 IC4.2 IC6.2 IC7.6 IC7.7 J1.5 J2.2 J3.4 J5.2 J6.3 R2.1 R11.1 R16.2 R17.2 SW1.1 SW2.1 SW3.1 SW4.1 U1.8 U1.13 U2.1 U2.2 U2.9 U2.16 U3.1 U4.8 U4.23 U4.35 U4.47 U5.1 VR1.3 | length 22681.5
  Top Layer w10: v1(4065,2705) 4090,2680 4150,2680 4185,2715 4185,2875 4170,2890 4170,2905 4181.42,2916.42 U4.35 ; C6.1 4215,3405 4265,3455 ; 4265,3575 4265,3455 ; U4.23 4286.42,3223.58 4265,3245 4265,3455 ; J2.2 4493.9,2663.9 4493.9,2780.79 4463.58,2811.1 U4.47 ; U4.8 4570.31,3034.53 4590,3054.21 4590,3085 4660,3155 4660,3208.87 4686.13,3235 4910.14,3235 4945,3200.14 C11.2
  Top Layer w15: 3850,2068.16 3852,2070.16 3852,2185 3852,2262 3895,2305 U3.1 ; 4675,3525 4770,3620 ; U1.8 4770,3620 ; C1.2 4970,3375 U1.13 4970,3525 4920,3575 4815,3575 4770,3620 ; IC7.6 5805.94,2475.59 R16.2 5831.54,2480 IC7.7
  Top Layer w25: v1(3440,2739.06) 3440,2625 3490,2575 C3.1 v1(3590,2575) ; U2.1 3514.41,3120.59 v1(3515,3120) 3515,3080 3545,3050 C2.1 3581.89,3093.74 3593.15,3105 U2.2 ; v1(3885,2925) C7.1 C5.1 4067,2878 4067,2707 v1(4065,2705) ; v1(4005,2605) C4.1 4060,2545 C24.2 ; R2.1 4415,2594.53 J2.2 ; 4385,3575 4645,3575 4675,3545 4675,3525 IC1.8@4675,3465.28 ; U5.1 4480,2400 4620,2540 C8.1 ; C23.2 4800,2810 4810,2800 4810,2665.94 R17.2 ; C22.1 R17.2 ; v1(4940,2705.94) R17.2 ; C11.2 5000,3220.14 C1.2 ; C18.2 4915.95,2415 4845,2344.05 v1(4845,2280) C19.2 ; IC3.2 v1(4992.4,2167.6) 4922.4,2167.6 4855,2235 C19.2 ; C21.1 C16.1 5600,2229.27 v1(5619.27,2210) ; C12.1 v1(5710,3340) ; C13.1 v1(5710,3610) ; C14.1 5820,3880 SW4.1 SW3.1 SW2.1 ; IC2.1@5726.54,2135 5680,2135 v1(5650,2165) 5619.27,2195.73 v1(5619.27,2210) ; IC2.3@5726.54,2235 5644.27,2235 v1(5619.27,2210) ; R11.1 5915,2340 v1(5870,2385) ; v1(4740,2252.99) v1(4700,2252.99) v1(4700,2295) v1(4740,2295) ; v1(4740,2252.99) v1(4780,2252.99) v1(4780,2295) v1(4740,2295) ; v1(4740,2252.99) v1(4740,2295) ; v1(4740,2252.99) 4757.99,2235 C19.2 ; v1(5870,2385) v1(5870,2465) R16.2 C15.2 v1(5870,2385)
  Top Layer w40: U2.1 U2.16 3514.41,3844.41 3550,3880 4035,3880 v1(4230,3685) ; J1.5@3644.49,2068.16 3850,2068.16 3955.51,2068.16 3955.51,2173.66 v1(3986.85,2205) ; 4065.59,3844.41 U2.9 4065.59,3664.41 4155,3575 4265,3575 4385,3575 ; U5.1 4562.01,2252.99 4627.49,2252.99 ; J6.3 4627.49,2252.99 ; v1(4700,2252.99) 4627.49,2252.99 ; C10.2@4945,3009.13 C10.2 ; C11.2@4945,3163.13 C10.2 ; SW1.1 5058.19,3078.19 5029.8,3049.8 C9.1 5028.67,3011.13 C10.2 ; 5420,2845 VR1.3 5445,3020 J3.4
  Bottom Layer w15: v1(4845,2280) 4830,2295 v1(4780,2295) ; v1(4740,2252.99) v1(4740,2295) ; v1(4740,2252.99) v1(4700,2252.99) v1(4700,2295) v1(4740,2295) ; v1(4740,2252.99) v1(4780,2252.99) v1(4780,2295) ; v1(4740,2295) v1(4780,2295)
  Bottom Layer w25: v1(3440,2739.06) 3440,3045 v1(3515,3120) 3710,2925 v1(3885,2925) ; v1(4065,2705) 4065,2665 v1(4005,2605) 3975,2575 v1(3590,2575) 3960,2205 v1(3986.85,2205) 4056.85,2275 ; U5.1 4415,2310.5 4379.5,2275 ; J2.2 4415,2550 4390,2525 4225,2525 4056.85,2356.85 4056.85,2275 ; J6.3 4379.5,2275 ; v1(4845,2280) 4845,2379.05 4915.95,2450 5065.2,2450 5170,2345.2 ; v1(4940,2705.94) 5139.06,2705.94 5170,2675 ; IC4.2 v1(4992.4,2167.6) 5307.6,2167.6 ; v1(5619.27,2210) 5695,2210 v1(5870,2385) v1(5870,2465) ; v1(5710,3340) 5820,3340 SW2.1 ; v1(5710,3610) 5820,3610 SW3.1 ; 4056.85,2275 4379.5,2275
  Bottom Layer w40: v1(4230,3685) 5180,3685 5460,3965 5765,3965 5910,3820 SW4.1 SW3.1 SW2.1 5910,3010 5805,2905 5630,2905 5570,2845 VR1.3 5270,2775 5170,2675 IC6.2 5170,2345.2 5240.2,2275 5415,2275 ; 5307.6,2167.6 5415,2275 ; v1(5870,2465) 5605,2465 5415,2275
  other v1: 5590,2165 5590,2255 5650,2255
MISO1: U4.16
NetC4_2: C4.2 U3.4 | length 96.9
  Top Layer w25: U3.4 C4.2
NetC10_1: C10.1 U4.5 X1.2 | length 325.6
  Top Layer w10: U4.5 4650.47,2975.47 4686.13,3011.13 X1.2
  Top Layer w25: X1.2 C10.1
NetC11_1: C11.1 U4.6 X1.1 | length 401.9
  Top Layer w10: U4.6 4605.16,2995.16 4740,3130 X1.1
  Top Layer w25: X1.1 C11.1
NetC20_1: C20.1 IC5.6 IC7.2 IC7.3 J4.2 J5.1 | length 987.2
  Top Layer w15: 5495,2740 5495.94,2739.06 IC5.6 ; C20.1@5600,2845 C20.1 ; 5775,2910 5805.94,2879.06 ; IC7.3 5805.94,2879.06 ; IC7.2 5831.54,2853.46 5805.94,2879.06
  Top Layer w25: J4.2 5495,2740 5595,2840 C20.1 5605,2865 5650,2910 5775,2910
  Top Layer w40: 5470,2845 C20.1@5600,2845
NetC20_2: C20.2 IC5.5 R13.1 | length 478.8
  Top Layer w25: R13.1 v1(5510,2685) ; IC5.5 5650,2795 C20.2 v1(5730,2840)
  Bottom Layer w25: v1(5510,2685) 5665,2840 v1(5730,2840)
NetC23_1: C23.1 FB1.1 IC6.3 R15.1 VR1.1 | length 644.5
  Top Layer w40: FB1.1 C23.1 4890,2845 VR1.1 IC6.3 R15.1
NetD1_1: D1.1 J1.1 | length 266.9
  Top Layer w15: D1.1 3720,2250 3748.82,2221.18 J1.1
NetIC2_2: IC2.2 R11.2 | length 146.2
  Top Layer w25: IC2.2@5726.54,2185 5770,2185 5825,2240 R11.2
NetIC2_6: IC2.6 R10.1 | length 111.2
  Top Layer w20: R10.1 5420,2235 IC2.6@5510,2235
NetIC2_7: IC2.7 R9.1 | length 111.2
  Top Layer w20: R9.1 5420,2185 IC2.7@5510,2185
NetIC3_3: IC3.3 IC4.3 R12.1 | length 261.3
  Top Layer w25: IC3.3 v1(4955,2330)
  Bottom Layer w25: v1(4955,2330) 4995,2330 5029.8,2295.2 IC4.3
NetIC3_4: IC3.4 IC4.4 | length 220
  Top Layer w25: v1(4915.95,2106.89) IC3.4
  Bottom Layer w10: v1(4915.95,2106.89) 4915.95,2084.05 4935,2065 5015,2065 5029.8,2079.8 IC4.4
NetIC5_1: IC5.1 IC7.4 | length 300.5
  Top Layer w15: IC5.1 5612.6,2662.6 5630,2680 5730,2680 5780.35,2730.35 IC7.4
NetIC5_2: IC5.2 R16.1 | length 187.6
  Top Layer w25: IC5.2 5650,2541.54 R16.1
NetIC5_3: IC5.3 IC7.5 | length 134.8
  Top Layer w15: IC5.3 5759.06,2620.94 5780.35,2599.65 IC7.5
NetIC6_1: IC6.1 VR1.2 | length 276.4
  Top Layer w40: VR1.2 5170,2784.06 5270,2684.06 IC6.1
NetIC7_1: IC7.1 IC7.8 | length 226.8
  Top Layer w15: IC7.8 IC7.1
NetLED1_1: LED1.1 R3.2 | length 85
  Top Layer w25: R3.2 LED1.1
NetLED1_2: LED1.2 U4.4 | length 1344.1
  Top Layer w10: U4.4 4514.21,2955.79 4470,3000 4470,3120 4490,3140 4590,3140 v1(4610,3160) ; v1(5160,3205) 5244.86,3205 5295,3255.14 5295,3300 5315,3320 5360,3320
  Top Layer w25: 5360,3320 5415,3320 5433.19,3301.81 LED1.2
  Bottom Layer w10: v1(4610,3160) 4655,3205 v1(5160,3205)
NetLED2_1: LED2.1 R4.2 | length 85
  Top Layer w25: R4.2 LED2.1
NetLED2_2: LED2.2 U4.3 | length 1650.3
  Top Layer w10: v1(4440,3070) 4440,3003.9 4507.8,2936.1 U4.3 ; v1(5119.8,3239.84) 5229.84,3239.84 5265,3275 5265,3560 5295,3590
  Top Layer w25: 5295,3590 5305,3600 5395,3600 5433.19,3561.81 LED2.2
  Bottom Layer w10: v1(4440,3070) 4440,3095 4584.84,3239.84 v1(5119.8,3239.84)
NetLED3_1: LED3.1 R5.2 | length 85
  Top Layer w25: R5.2 LED3.1
NetLED3_2: LED3.2 U4.2 | length 1955.6
  Top Layer w10: v1(4415,3113.27) 4412,3110.27 4412,3007.86 4503.44,2916.42 U4.2 ; v1(5070,3275) 5215,3275 5231.42,3291.42 5231.42,3665
  Top Layer w25: 5231.42,3665 5231.42,3795.98 5285.43,3850 v1(5433.19,3850) LED3.2
  Bottom Layer w10: v1(4415,3113.27) 4576.73,3275 v1(5070,3275)
NetLED4_2: LED4.2 R10.2 | length 65
  Top Layer w20: LED4.2 R10.2
NetLED5_2: LED5.2 R9.2 | length 65
  Top Layer w20: LED5.2 R9.2
NetR2_2: R2.2 U4.44 | length 146.9
  Top Layer w10: R2.2 4397.21,2702.32 4397.21,2778.01 4404.53,2785.33 U4.44
NetRN1_5: RN1.5 U1.3 | length 130.9
  Top Layer w15: U1.3 5020,3750 5050,3780 RN1.5
NetRN1_6: RN1.6 U1.2 | length 123.3
  Top Layer w15: U1.2 5070,3758.5 5081.5,3770 RN1.6
NetRN1_7: RN1.7 U1.1 | length 121.4
  Top Layer w15: RN1.7 5112.99,3770 5120,3762.99 U1.1
NetRN1_8: RN1.8 U1.15 | length 420.9
  Top Layer w15: U1.15 5070,3525 5180,3635 5180,3750 5144.49,3785.51 RN1.8
NetRN2_5: RN2.5 U1.7 | length 130
  Top Layer w15: U1.7 4820,3752.24 4847.76,3780 RN2.5
NetRN2_6: RN2.6 U1.6 | length 122.3
  Top Layer w15: U1.6 4870,3760.75 4879.25,3770 RN2.6
NetRN2_7: RN2.7 U1.5 | length 122.3
  Top Layer w15: RN2.7 4910.75,3770 4920,3760.75 U1.5
NetRN2_8: RN2.8 U1.4 | length 130
  Top Layer w15: RN2.8 4942.24,3780 4970,3752.24 U1.4
NetU2_4: U2.4 U4.38 | length 796.8
  Top Layer w10: U4.38 v1(4286.42,2920)
  Top Layer w15: 3940,3005 v1(4065.59,3005)
  Top Layer w25: U2.4 3750.63,3039.37 3785,3005 3940,3005
  Bottom Layer w15: v1(4065.59,3005) 4201.42,3005 v1(4286.42,2920)
nRST: C9.2 R1.2 SW1.2 U4.7 | length 998.9
  Top Layer w10: U4.7 4584.84,3014.84 4627.49,3057.49 v1(4627.49,3058.75)
  Top Layer w25: v1(4690,2945.2) 5164.8,2945.2 5184.8,2965.21 R1.2
  Top Layer w40: C9.2 R1.2 5184.8,3088.39 SW1.2
  Bottom Layer w25: v1(4627.49,3058.75) 4627.49,3007.71 v1(4690,2945.2)
PA1: C22.2 R14.2 R17.1 U4.11 | length 1018.6
  Top Layer w10: v1(4500,3105) 4511.42,3093.58 U4.11 ; 4555,2770 4555,2815 4580,2840 4580,2945 4590,2955 4630,2955 v1(4650,2935)
  Top Layer w25: 4555,2770 4555,2705 4580,2680 4675,2680 4734.06,2620.94 R17.1 C22.2 R14.2
  Bottom Layer w10: v1(4500,3105) 4545,3060 4545,3040 v1(4650,2935)
PA4: U1.12 U4.14 | length 662.6
  Top Layer w10: U4.14 4463.58,3203.58 4565,3305 4895.75,3305 4920,3329.25 U1.12
PA5: U1.11 U4.15 | length 626.2
  Top Layer w10: U4.15 4443.9,3213.9 4555,3325 4845,3325 4870,3350 U1.11
PA7: U1.14 U4.17 | length 1038.7
  Top Layer w10: U4.17 4404.53,3205.32 4544.21,3345 4695,3345 v1(4720,3370)
  Top Layer w25: U1.14 v1(5020,3590)
  Bottom Layer w25: v1(4720,3370) 4720,3535 4775,3590 v1(5020,3590)
PA8: U2.15 U4.29 | length 1039.6
  Top Layer w10: 3955,3355 4000,3310 4035,3310 4115,3230 4115,3079.8 4160.28,3034.53 U4.29
  Top Layer w25: U2.15 3593.15,3716.85 3955,3355
PA9: U3.3 U4.30 | length 802.2
  Top Layer w10: 4110,2900 4110,2985 4139.84,3014.84 U4.30
  Top Layer w15: 4110,2840 4110,2900
  Top Layer w25: U3.3 v1(3960,2405) ; v1(4110,2735) 4110,2840
  Bottom Layer w25: v1(3960,2405) 4110,2555 v1(4110,2735)
PA10: U3.2 U4.31 | length 822.4
  Top Layer w10: 4150,2900 4150,2977.33 4167.82,2995.16 U4.31
  Top Layer w15: 4150,2840 4150,2900
  Top Layer w25: U3.2 v1(3970.59,2355) ; v1(4150,2735) 4150,2840
  Bottom Layer w25: v1(3970.59,2355) 4150,2534.41 v1(4150,2735)
PB0: J6.2 U4.18 U5.2 | length 1768.5
  Top Layer w10: U4.18 4384.84,3239.84 v1(4385,3240)
  Top Layer w40: J6.2 U5.2
  Bottom Layer w25: U5.2 4315,2440 4360,2485 4565,2485 4620,2540 4620,2620 4560,2680 4315,2680 4260,2735 4260,2835 4330,2905 4330,3205 4365,3240 v1(4385,3240)
PB3: C12.2 R6.2 SW2.2 U4.39 | length 1957.5
  Top Layer w10: U4.39 4306.1,2887.83 4368.27,2950 v1(4415,2950)
  Top Layer w25: R6.2 C12.2 SW2.2
  Bottom Layer w10: v1(4415,2950) 4412,2947 4412,2858 4470,2800 4615,2800
  Bottom Layer w25: 4615,2800 4745,2800 4980,3035 5325,3035 5540,3250 SW2.2
PB4: C13.2 R7.2 SW3.2 U4.40 | length 1952.9
  Top Layer w10: U4.40 4325.79,2865.79 4380,2920 v1(4440,2920)
  Top Layer w25: R7.2 C13.2 SW3.2
  Bottom Layer w10: v1(4440,2920) 4440,2865 4465,2840 4615,2840
  Bottom Layer w25: 4615,2840 4720,2840 4960,3080 5270,3080 SW3.2
PB5: C14.2 R8.2 SW4.2 U4.41 | length 2050.1
  Top Layer w10: U4.41 4345.47,2860.47 4370,2885 v1(4470,2885)
  Top Layer w25: R8.2 C14.2 SW4.2
  Bottom Layer w10: v1(4470,2885) 4475,2880 4615,2880
  Bottom Layer w25: 4615,2880 4695,2880 4940,3125 5220,3125 5540,3445 5540,3620 SW4.2
PB6: J3.2 U4.42 | length 1632.7
  Top Layer w10: v1(4314.53,2790) 4345.47,2790 4365.16,2809.68 U4.42
  Bottom Layer w10: v1(4314.53,2790) 4314.53,2730.47 4335,2710 4504.5,2710 4514.5,2720 4615,2720
  Bottom Layer w25: 4615,2720 4805,2720 5010,2925 5560,2925 5645,3010 J3.2
PB7: J3.3 U4.43 | length 1447.6
  Top Layer w10: v1(4345,2750) 4345.16,2750 4384.84,2789.69 U4.43
  Bottom Layer w10: v1(4345,2750) 4360,2735 4490,2735 4515,2760 4615,2760
  Bottom Layer w25: 4615,2760 4775,2760 4985,2970 5505,2970 5545,3010 J3.3
PB8: IC1.4 U4.45 | length 842.9
  Top Layer w10: v1(4424.21,2764.21) U4.45
  Top Layer w25: v1(4425,3305) 4425.2,3305 4475,3354.8 IC1.4@4475,3465.28
  Bottom Layer w10: v1(4424.21,2764.21) 4365,2823.43 4365,3165 4425,3225 v1(4425,3305)
PB9: IC1.3 U4.46 | length 858.6
  Top Layer w10: U4.46 4443.9,2786.1 v1(4465,2765)
  Top Layer w25: v1(4425,3355) IC1.3@4425,3465.28
  Bottom Layer w10: v1(4425,3355) 4460,3320 4460,3215 4385,3140 4385,2845 v1(4465,2765)
PB10: IC1.2 U4.21 | length 311.5
  Top Layer w10: U4.21 4325.79,3235.31 4375,3284.53 4375,3335
  Top Layer w25: 4375,3335 IC1.2@4375,3465.28
PB11: IC1.1 U4.22 | length 299
  Top Layer w10: U4.22 4306.1,3300
  Top Layer w25: 4306.1,3300 4306.1,3361.1 4325,3380 IC1.1@4325,3465.28
PB12: U2.5 U4.25 | length 576.8
  Top Layer w10: U4.25 4227.68,3113.27 4235,3120.59 4235,3150 4225,3160 v1(4210,3160)
  Top Layer w25: U2.5 3830,3166.22 v1(3830,3090)
  Bottom Layer w25: v1(3830,3090) 3900,3160 v1(4210,3160)
PB13: U2.12 U4.26 | length 853.9
  Top Layer w10: 3965.3,3584.7 4166,3384 4166,3102.08 4174.5,3093.58 U4.26
  Top Layer w25: U2.12 3829.37,3720.63 3965.3,3584.7
PB14: U2.13 U4.27 | length 908.7
  Top Layer w10: 3959.04,3510.96 4149,3321 4149,3095.04 4170.14,3073.9 U4.27
  Top Layer w25: U2.13 3750.63,3719.37 3959.04,3510.96
PB15: U2.14 U4.28 | length 964
  Top Layer w10: 3952.65,3442.65 3970.3,3425 3970,3425 4132,3263 4132,3088 4165.79,3054.21 U4.28
  Top Layer w25: U2.14 3671.89,3723.41 3952.65,3442.65
SWCLK: J2.4 U4.37 | length 272.3
  Top Layer w10: J2.4 4266.73,2636.73 U4.37
SWDIO: J2.3 U4.34 | length 425.8
  Top Layer w10: U4.34 4235,2936.1 4245,2926.1 4245,2685 v1(4230,2670)
  Bottom Layer w10: v1(4230,2670) J2.3
VBAT: C16.2 C21.2 IC2.5 J4.1 R13.2 SW5.1 | length 546.2
  Top Layer w25: J4.1 5410,2555 R13.2 C16.2 IC2.5@5510,2285
  Top Layer w40: SW5.1 J4.1
VCCA: C8.2 FB1.2 U4.9 | length 600.3
  Top Layer w10: v1(4500,3054.21) U4.9
  Top Layer w25: v1(4610,2925) 4610,2735 C8.2
  Top Layer w40: C8.2 FB1.2
  Bottom Layer w15: v1(4500,3054.21) 4500,2980 4555,2925 v1(4610,2925)
VCCB: C18.1 IC3.1 IC4.1 R12.2 R14.1 R15.2 SW5.2 | length 1050.8
  Top Layer w25: IC3.1 5029.8,2314.8 R12.2
  Top Layer w40: R14.1 4885.94,2460.94 4945,2520 R15.2 5000,2520 5045,2475 C18.1 5075,2385 5100,2385 ; R12.2 5100,2385 ; SW5.2 5100,2385
  Bottom Layer w25: IC4.1 4955,2265 4915,2305 4915,2355 4935,2375 5020,2375 v1(5055,2340)
pads on no net: IC1.5 IC1.6 IC1.7 IC1.9 IC1.10 IC1.11 IC1.12 IC5.4 J1.4 LSEG1.0 LSEG2.0 LSEG3.0 LSEG4.0 RN1.0 RN2.0 U1.9 U2.6 U2.7 U2.8 U2.10 U2.11 U3.7 U3.8 U3.9 U3.10 U3.11 U3.12 U3.13 U3.14 U3.15 U4.1 U4.10 U4.12 U4.13 U4.19 U4.20 U4.32 U4.33

## Polygon pours and split planes (outlines as drawn)
GND on Top Layer "GND_L01_P000" (solid, remove dead copper, pour order 0): 3395,2000 5975,2000 5975,4850 3395,4850
GND on Bottom Layer "GND_L02_P002" (solid, remove dead copper, pour order 2): 3395,2000 5975,2000 5975,4850 3395,4850

## Keep-outs
Keep-Out Layer:
  the board outline again, w10

## Silkscreen, mask and mechanical layers (free items; w line width, h text height)
Top Overlay:
  drawing of 1637 lines, arcs and shapes, not listed
  text "LoRa" at 3462.95,3865 h40
  text "WSN-NODE" at 4235,3815 h70
  text "BUTTONS & LEDS" at 5290,3355 h40 r90
  text "DISPLAY" at 4590,3325 h40
  text "MCU" at 4530,3199 h40
  text "DEBUG" at 3445,2660 h30
  text "SENSOR" at 4475,2470 h30
  text "POWER" at 5245,2025 h40
Bottom Overlay:
  text "@Ven / @NVDung / @NTPhong" at 4020,3445 h50